# Altium PCB 0084 - AR Display Board Rev2.1.PcbDoc (part 2 of 3)
Units mm, origin at the board's own origin, x right, y up, seen from the top; angles counter-clockwise.
Board outline 127.7 x 27.2 mm, 4 copper layers (L1-TOP, L2-GND, L3-GND, L4-BOT), stack 1.571 mm thick; 141 components, 141 nets, 671 pads, 447 vias.
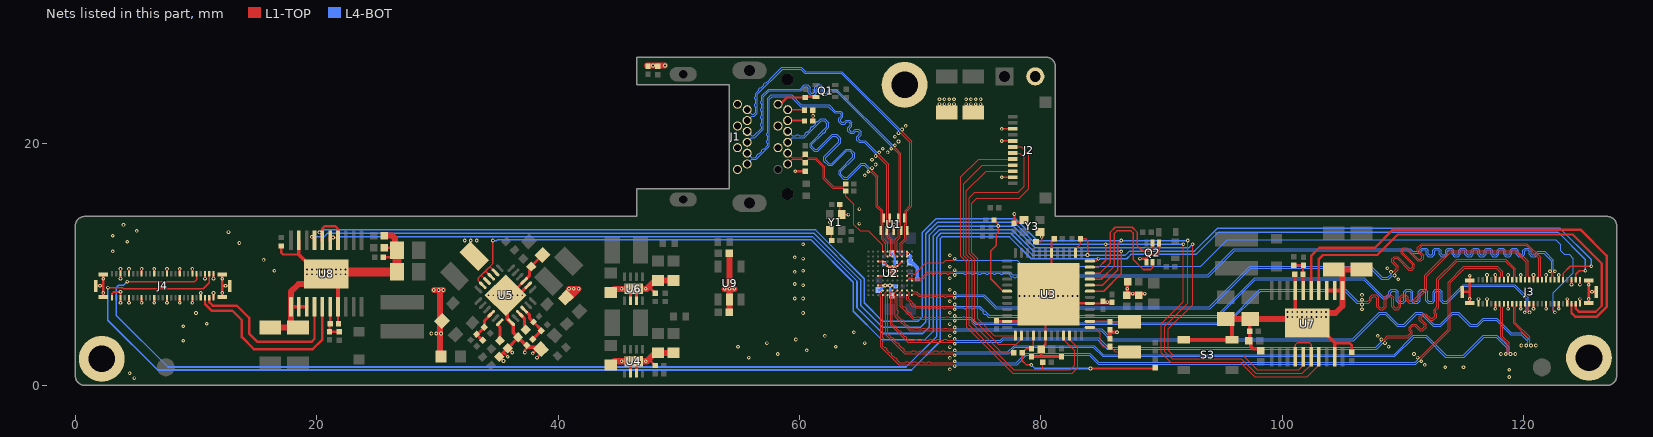
[diagram p4: the nets of this part, all layers, seen from the top]

## Via types
v1: diameter 0.3, hole 0.15, L1-TOP to L4-BOT, tented both sides, 445 vias
v2: diameter 0.25, hole 0.1, L1-TOP to L4-BOT, tented both sides, 2 vias

## Nets (pads, with @x,y where several pads share a name; then routed paths per layer and width w, separated by ;. In a path a pad name is that pad's centre, name@x,y a point inside that pad or via, vN(x,y) a via of type N, cw(c..) or ccw(c..) an arc to the next point about the centre after c; other vN are vias at no path point) (continued)
CN: C41.1 U5.18 | length 2
  L1-TOP w0.1: U5.18@34.944,4.999 U5.18@35.167,5.221
  L1-TOP w0.25: U5.18@35.167,5.221 35,5.055 35,5 35.182,4.818 C41.1@35.182,3.718
CP: C40.1 U5.21 | length 1.6
  L1-TOP w0.25: U5.21@36.829,5.929 37.2,5.557 37.2,4.547 C40.1@37.262,4.485
DP_AUX_CH_N: C3.2 J1.18 R2.2 U2.A4 | length 13.5
  L1-TOP w0.076: J1.18@59.015,18.34 59.389,18.714 60.186,18.714 R2.2@60.46,18.44 60.734,18.714 61.286,18.714 61.948,18.052 61.948,17.137 62.761,16.324 63.606,16.324 C3.2@63.83,16.1 63.83,15.67 64.5,15 64.5,13.326 65.026,12.8 65.7,12.8 66.9,11.6 U2.A4@66.9,11.075
DP_AUX_CH_P: C2.2 J1.16 R1.1 | length 6.8
  L1-TOP w0.076: J1.16@59.015,19.24 59.389,18.866 60.186,18.866 R1.1@60.46,19.14 60.734,18.866 61.349,18.866 62.1,18.116 62.1,17.2 62.824,16.476 63.606,16.476 C2.2@63.83,16.7
DP_CFG1: J1.4 R4.2 | length 1.4
  L1-TOP w0.15: J1.4@59.015,22.84 60.37,22.84 R4.2@60.41,22.8
DP_CFG2: J1.6 R3.2 | length 1.4
  L1-TOP w0.15: J1.6@59.015,21.94 60.37,21.94 R3.2@60.41,21.9
DP_HPD: J1.2 Q1.3 R23.2 | length 3.5
  L1-TOP w0.2: J1.2@58.215,23.09 58.975,23.85 R23.2@60.46,23.85 60.51,23.9 Q1.3@61.36,23.9
DP_LANE0_N: J1.10 U1.9 U2.A5 | length 28.7
  L1-TOP w0.076: v1(66,18) 66,17.808 66.5,17.308 66.5,14.876 66.905,14.471 66.905,13.395 66.945,13.355 66.945,12.171 67.3,11.816 U2.A5@67.3,11.075
  L4-BOT w0.076: J1.10@59.015,21.04 59.389,20.666 59.675,20.666 cw(c59.827,20.551) 59.98,20.666 60.2,20.666 60.341,20.666 60.45,20.775 cw(c60.639,20.802) 60.666,20.991 60.881,21.206 cw(c61.07,21.233) 61.097,21.422 61.312,21.637 cw(c61.501,21.664) 61.528,21.853 61.562,21.888 61.75,22.075 62.1,22.075 62.425,21.75 62.425,21.375 62.175,21.125 cw(c61.986,21.098) 61.959,20.909 61.875,20.825 61.025,19.975 61.025,19.8 61.275,19.55 61.459,19.55 62.709,20.8 63.066,20.8 63.402,20.463 63.402,20.102 62.175,18.875 62.175,18.65 62.448,18.377 62.662,18.377 63.862,19.577 64.213,19.577 64.577,19.213 64.577,18.877 63.425,17.725 63.425,17.5 63.7,17.225 63.934,17.225 65.112,18.402 65.405,18.402 65.808,18 v1(66,18)
DP_LANE0_P: J1.12 U1.1 U2.B5 | length 28.7
  L1-TOP w0.076: v1(65.7,17.7) 65.892,17.7 66.348,17.245 66.348,14.812 66.753,14.407 66.753,13.332 66.793,13.292 66.793,12.107 67.148,11.752 67.148,11.223 67.1,11.175 67.1,10.875 U2.B5@67.3,10.675
  L4-BOT w0.076: J1.12@59.015,20.14 59.389,20.514 60.404,20.514 61.813,21.923 62.037,21.923 62.273,21.687 62.273,21.438 60.873,20.038 60.873,19.737 61.212,19.398 61.523,19.398 62.773,20.648 63.002,20.648 63.25,20.4 63.25,20.166 62.023,18.938 62.023,18.587 62.384,18.225 62.725,18.225 63.925,19.425 64.15,19.425 64.425,19.15 64.425,18.941 63.273,17.788 63.273,17.437 63.637,17.073 63.998,17.073 65.175,18.25 65.342,18.25 65.7,17.892 v1(65.7,17.7)
DP_LANE1_N: J1.15 U1.8 U2.A6 | length 28.7
  L1-TOP w0.076: v1(66.6,19.3) 66.6,19.108 67.397,18.31 67.397,13.388 67.435,13.351 67.435,12.34 67.7,12.075 U2.A6@67.7,11.075
  L4-BOT w0.076: J1.15@55.665,19.24 56.039,18.866 56.351,18.866 56.458,18.974 56.458,19.082 56.566,19.189 56.674,19.189 56.889,19.405 56.889,19.513 56.997,19.621 57.105,19.621 57.321,19.836 57.36,19.876 57.36,20.028 57.284,20.104 57.284,20.257 57.36,20.333 57.36,20.638 57.284,20.714 57.284,20.866 57.36,20.942 57.36,21 57.36,23.776 57.659,24.075 59.341,24.075 60.163,23.252 62.455,23.252 62.98,22.728 63.394,22.728 63.59,22.532 63.59,22.243 63.402,22.055 63.402,21.892 63.508,21.785 63.671,21.785 63.859,21.974 64.149,21.974 64.344,21.778 64.344,21.489 64.156,21.3 64.156,21.137 64.262,21.031 64.425,21.031 64.614,21.219 64.903,21.219 65.099,21.024 65.099,20.734 64.91,20.546 64.91,20.383 65.017,20.277 65.431,20.277 65.707,20 66.408,19.3 v1(66.6,19.3)
DP_LANE1_P: J1.17 U1.2 U2.B6 | length 28.7
  L1-TOP w0.076: v1(66.3,19) 66.492,19 67.245,18.247 67.245,13.325 67.282,13.288 67.282,12.277 67.548,12.012 67.548,11.223 67.5,11.175 67.5,10.875 U2.B6@67.7,10.675
  L4-BOT w0.076: J1.17@55.665,18.34 56.039,18.714 56.414,18.714 57.512,19.812 57.512,23.712 57.723,23.923 59.277,23.923 60.1,23.1 62.392,23.1 62.917,22.575 63.331,22.575 63.438,22.469 63.438,22.306 63.249,22.118 63.249,21.828 63.445,21.633 63.734,21.633 63.922,21.821 64.086,21.821 64.192,21.715 64.192,21.552 64.004,21.363 64.004,21.074 64.199,20.879 64.489,20.879 64.677,21.067 64.84,21.067 64.946,20.961 64.946,20.797 64.758,20.609 64.758,20.32 64.953,20.124 65.368,20.124 65.555,19.937 66.3,19.192 v1(66.3,19)
DP_LANE2_N: J1.9 U1.4 U2.A7 | length 28.7
  L1-TOP w0.076: v1(67.9,19.9) 67.9,19.708 68.397,19.21 68.397,13.347 68.347,13.297 68.347,12.272 68.1,12.025 U2.A7@68.1,11.075
  L4-BOT w0.076: J1.9@55.665,21.04 56.039,20.666 56.226,20.666 56.86,21.301 56.86,21.453 56.784,21.529 56.784,21.682 56.86,21.758 56.86,22.063 56.784,22.139 56.784,22.291 56.86,22.367 56.86,22.672 56.784,22.748 56.784,22.901 56.86,22.977 56.86,23.282 56.784,23.358 56.784,23.51 56.86,23.587 56.86,23.775 56.86,23.976 57.434,24.55 59.85,24.55 60.053,24.55 60.395,24.893 60.672,24.893 60.876,24.688 60.876,24.323 60.992,24.207 61.142,24.207 61.257,24.323 61.257,24.688 61.462,24.893 61.738,24.893 61.943,24.688 61.943,24.323 62.058,24.207 62.209,24.207 62.551,24.55 63.058,24.55 67.708,19.9 v1(67.9,19.9)
DP_LANE2_P: J1.11 U1.7 U2.B7 | length 28.7
  L1-TOP w0.076: v1(67.6,19.6) 67.792,19.6 68.245,19.147 68.245,13.411 68.195,13.361 68.195,12.336 67.948,12.088 67.948,11.223 67.9,11.175 67.9,10.875 U2.B7@68.1,10.675
  L4-BOT w0.076: J1.11@55.665,20.14 56.039,20.514 56.289,20.514 57.012,21.237 57.012,23.912 57.498,24.398 59.918,24.398 60.116,24.398 60.458,24.74 60.609,24.74 60.724,24.625 60.724,24.26 60.929,24.055 61.205,24.055 61.41,24.26 61.41,24.625 61.525,24.74 61.675,24.74 61.791,24.625 61.791,24.26 61.995,24.055 62.272,24.055 62.614,24.398 62.995,24.398 67.6,19.792 v1(67.6,19.6)
DP_LANE3_N: J1.3 U1.5 U2.A8 | length 28.7
  L1-TOP w0.076: U2.A8@68.5,11.075 68.5,11.725 68.855,12.08 68.855,13.289 68.895,13.329 68.895,14.42 69.3,14.824 69.3,20.208 68.5,21.008 v1(68.5,21.2)
  L4-BOT w0.076: J1.3@55.665,22.84 56.039,22.466 56.2,22.466 56.36,22.626 56.36,22.9 56.36,23.052 56.284,23.129 56.284,23.281 56.36,23.357 56.36,23.662 56.284,23.738 56.284,23.891 56.36,23.967 56.36,24.1 56.36,24.176 56.5,24.316 56.615,24.43 56.615,24.538 56.722,24.646 56.83,24.646 57.046,24.861 57.046,24.969 57.153,25.077 57.261,25.077 57.477,25.292 57.584,25.4 58.537,26.352 60.148,26.352 60.5,26 63.508,26 68.308,21.2 v1(68.5,21.2)
DP_LANE3_P: J1.5 U1.6 U2.B8 | length 28.7
  L1-TOP w0.076: v1(68.2,20.9) 68.392,20.9 69.148,20.145 69.148,14.888 68.743,14.483 68.743,13.393 68.703,13.353 68.703,12.143 68.348,11.788 68.348,11.223 68.3,11.175 68.3,10.875 U2.B8@68.5,10.675
  L4-BOT w0.076: J1.5@55.665,21.94 56.039,22.314 56.263,22.314 56.512,22.563 56.512,24.112 58.6,26.2 60.084,26.2 60.437,25.848 63.445,25.848 68.2,21.092 v1(68.2,20.9)
FBL: C49.2 R35.2 R37.2 U7.16 | length 2.9
  L1-TOP w0.2: R35.2@100.96,9.95 C49.2@101.74,9.95 ; U7.16@101.75,7.844 U7.16@101.729,7.865 101.729,9.181 R37.2@101.71,9.2 101.71,9.92 C49.2@101.74,9.95 ; C49.2@101.76,9.97 C49.2@101.74,9.95
FBN: C36.2 R29.2 R30.2 U5.16 | length 3
  L1-TOP w0.25: R30.2@33.747,3.747 33.719,3.747 C36.2@33.233,4.233 33.316,4.233 R29.2@33.897,4.814 33.897,5.365 U5.16@34.46,5.929
FBP: C34.2 R26.2 R28.2 U5.22 | length 3.3
  L1-TOP w0.1: R26.2@38.597,4.519 R26.2@38.597,4.613
  L1-TOP w0.25: U5.22@37.182,6.282 37.644,5.82 37.644,5.566 C34.2@37.956,5.253 R26.2@38.597,4.613 ; R28.2@37.892,3.814 R26.2@38.597,4.519
FBR: C50.2 R36.2 R38.2 U8.16 | length 3
  L1-TOP w0.2: C50.2@20.96,4.43 20.96,4.45 C50.2@21.06,4.45 ; R38.2@21.01,5.1 21.118,5.208 U8.16@21.118,6.516 ; R38.2@21.06,5.1 C50.2@21.06,4.45 ; R36.2@21.86,4.45 C50.2@21.06,4.45
GND: C1.1 C4.1 C5.2 C6.2 C7.2 C8.2 C9.2 C10.1 C11.1 C12.1 C13.1 C14.1 C15.1 C16.1 C17.1 C18.1 C19.1 C20.1 C21.1 C22.1 C23.1 C24.1 C25.1 C26.2 C27.2 C28.1 C29.1 C30.1 C31.1 C32.1 C33.1 C35.2 C37.1 C38.1 C39.1 C40.2 C41.2 C42.1 C43.1 C44.1 C45.1 C46.1 C47.1 C48.1 C51.1 C52.1 C53.1 C54.1 C55.2 C56.2 C57.1 C58.2 C59.2 C60.1 C61.1 C62.1 CON2.2 J1.1 J1.7 J1.8 J1.13 J1.14 J1.19 J2.2 J2.8 J2.10 J3.1 J3.5 J3.6 J3.9 J3.10 J3.15 J3.16 J3.21 J3.22 J3.27 J3.28 J3.33 J3.34 J3.39 J3.40 J3.43 J3.46 J3.49 J3.50 J3.M J4.1 J4.5 J4.6 J4.9 J4.10 J4.15 J4.16 J4.21 J4.22 J4.27 J4.28 J4.33 J4.34 J4.39 J4.40 J4.43 J4.46 J4.49 J4.50 J4.M L4.2 pad.0 Q2.1 Q2.4 R2.1 R3.1 R4.1 R5.1 R27.1 R28.1 R34.1 R37.1 R38.1 R39.1 R40.1 R41.1 R42.1 S3.1 U1.3 U2.A9 U2.B9 U2.C3 U2.C4 U2.C8 U2.D5 U2.D6 U2.D7 U2.E5 U2.E6 U2.E7 U2.F3 U2.F4 U2.F5 U2.F6 U2.F7 U2.H3 U2.H4 U2.H5 U2.H6 U3.5 U3.18 U3.35 U3.42 U3.49 U4.2 U4.3 U4.9 U5.2 U5.3 U5.19 U5.25 U6.2 U6.3 U6.9 U7.9 U7.11 U7.12 U7.13 U7.17 U7.21 U8.9 U8.11 U8.12 U8.13 U8.17 U8.21 U9.2 Y1.2 Y1.4 Y3.2 Y3.4 | length 216.9
  L1-TOP w0.1: U5.25@35.775,7.467 U5.25@35.998,7.467 ; C40.2@36.626,3.848 36.815,3.848 C40.2@36.867,3.848 ; C33.1@38.71,10.796 C33.1@38.71,10.801 ; U4.9@46.01,1.75 v1(46.26,2) U4.9@46.51,1.75 ; U6.9@46.01,7.75 v1(46.26,8) U6.9@46.51,7.75 ; C43.1@48.01,8.35 C43.1@48.36,8.7 ; C32.1@48.11,2.35 48.46,2.7 C32.1@48.31,2.85 ; U3.49@78.375,5.3 80.375,7.3 U3.49@80.625,7.55 ; U3.49@80.875,7.8 U3.49@80.625,7.55 ; U3.49@81.375,6.8 U3.49@80.625,7.55 ; U7.21@101.23,5.979 101.709,5.5 U7.21@102.05,5.159 102.641,5.159 U7.21@102.741,5.159 ; U7.21@101.9,6 U7.21@103.25,4.65 ; U7.21@102.379,5.488 U7.21@102.841,5.95
  L1-TOP w0.125: v1(76.75,17.25) J2.2@77.66,17.25 77.635,17.25 J2.2@77.66,17.275 ; v1(76.75,20.25) J2.8@77.66,20.25 ; v1(76.75,21.25) J2.10@77.66,21.25
  L1-TOP w0.127: R3.1@61.11,21.9 R4.1@61.11,22.8 R4.1@61.135,22.775 ; Y1.2@62.46,12.85 62.63,12.68 C7.2@62.63,12 ; Y1.2@62.5,12.85 v1(62.5,13.5) ; Y1.4@63.29,14.32 Y1.4@63.46,14.15 ; C8.2@63.33,15 63.33,14.32 Y1.4@63.5,14.15 v1(64.05,14.15)
  L1-TOP w0.15: v1(77.8,14.2) 77.8,13.47 C59.2@77.76,13.43 77.83,13.5 78.41,13.5 Y3.4@78.61,13.7 ; C58.2@79.59,11.9 79.96,11.9 80.06,12 80.06,12.55 Y3.2@79.91,12.7
  L1-TOP w0.152: J4.1@3.05,7.25 3.05,7.6 3.2,7.75 v1(3.75,7.75) ; U2.H3@66.5,8.275 U2.H4@66.9,8.275 U2.H5@67.3,8.275 U2.H6@67.7,8.275 ; U2.F3@66.5,9.075 66.502,9.073 67.298,9.073 U2.F5@67.3,9.075 U2.F6@67.7,9.075 ; U2.C3@66.5,10.275 66.502,10.273 66.902,10.273 U2.D5@67.3,9.875 67.302,9.873 U2.D6@67.7,9.873 ; U2.E5@67.3,9.475 U2.E6@67.7,9.475 ; U2.F7@68.1,9.075 U2.F6@67.7,9.075 ; U2.E7@68.1,9.475 U2.E6@67.7,9.475 ; U2.C8@68.5,10.275 U2.D7@68.1,9.875 68.098,9.873 U2.D6@67.7,9.873 ; C13.1@76.3,5.355 C13.1@76.355,5.3 ; U2.F6@67.7,9.075 U2.E6@67.7,9.475 ; U2.E6@67.7,9.475 U2.D6@67.7,9.873 ; U2.B9@68.9,10.675 69,10.775 v1(69,10.875) 69,10.975 U2.A9@68.9,11.075 U2.B9@68.9,10.675
  L1-TOP w0.175: U3.5@84.05,6.8 C17.1@85.8,6.8
  L1-TOP w0.18: v1(3.75,6.85) J4.5@3.75,7.25 v1(3.75,7.75) ; v1(3.75,8.85) J4.6@3.75,9.25 v1(3.75,9.65) ; v1(4.45,6.85) J4.9@4.45,7.25 ; J4.10@4.45,9.25 v1(4.45,9.65) ; v1(5.5,6.85) J4.15@5.5,7.25 ; J4.16@5.5,9.25 v1(5.5,9.65) ; v1(6.55,6.85) J4.21@6.55,7.25 ; J4.22@6.55,9.25 v1(6.55,9.65) ; v1(7.6,6.85) J4.27@7.6,7.25 ; J4.28@7.6,9.25 v1(7.6,9.65) ; v1(8.65,6.85) J4.33@8.65,7.25 ; J4.34@8.65,9.25 v1(8.65,9.65) ; v1(9.7,6.85) J4.39@9.7,7.25 ; J4.40@9.7,9.25 v1(9.7,9.65) ; J4.43@10.4,7.25 v1(10.4,7.65) ; v1(10.75,8.85) J4.46@10.75,9.25 ; J4.49@11.45,7.25 v1(11.45,7.65) ; v1(11.45,8.85) J4.50@11.45,9.25 ; J3.M@115.385,6.815 J3.M@115.525,6.815 ; J3.M@115.385,8.685 J3.M@115.525,8.685 v1(115.525,9.085) ; J3.1@116.25,6.75 v1(116.25,7.15) ; J3.5@116.95,6.75 v1(116.95,7.15) ; J3.6@116.95,8.75 v1(116.95,9.15) ; v1(117.65,6.35) J3.9@117.65,6.75 ; J3.10@117.65,8.75 v1(117.65,9.15) ; v1(118.7,6.35) J3.15@118.7,6.75 ; J3.16@118.7,8.75 v1(118.7,9.15) ; v1(119.75,6.35) J3.21@119.75,6.75 ; J3.22@119.75,8.75 v1(119.75,9.15) ; v1(120.8,6.35) J3.27@120.8,6.75 ; J3.28@120.8,8.75 v1(120.8,9.15) ; v1(121.85,6.35) J3.33@121.85,6.75 ; J3.34@121.85,8.75 v1(121.85,9.15) ; v1(122.9,6.35) J3.39@122.9,6.75 ; J3.40@122.9,8.75 v1(122.9,9.15) ; J3.43@123.6,6.75 v1(123.6,7.15) ; v1(123.95,8.35) J3.46@123.95,8.75 ; J3.49@124.65,6.75 v1(124.65,7.15) ; v1(124.65,8.35) J3.50@124.65,8.75
  L1-TOP w0.2: J4.M@1.7,8.25 2.325,8.25 ; J4.M@2.325,7.315 v1(2.325,7.665) 2.325,8.25 ; J4.M@2.325,9.185 v1(2.325,8.835) 2.325,8.25 ; J4.M@12.175,7.315 12.175,8.25 ; J4.M@12.175,9.185 v1(12.175,8.835) 12.175,8.25 ; J4.M@12.8,8.25 12.175,8.25 ; R42.1@17.06,11.55 17.06,11 17.218,10.842 18.518,10.842 ; R38.1@21.71,5.1 21.768,5.158 U8.17@21.768,6.516 ; R41.1@25.51,10.6 C47.1@26.66,10.6 ; C56.2@25.61,11.4 26.66,11.4 C47.1@26.66,11.2 ; C35.2@35.118,2.382 v1(35.475,2.025) ; 35.456,2.719 35.481,2.719 v1(35.825,2.375) ; C41.2@35.818,3.082 36.175,2.725 v1(36.2,2.725) ; v1(37.25,2.725) 37.25,2.925 R28.1@37.5,3.175 ; v1(37.9,2.65) 38.225,2.975 C30.1@38.225,3.175 ; v1(38.25,2.3) 38.578,2.628 C30.1@38.578,3.001 ; v1@47.36,2 47.71,2 R27.1@48.06,1.65 ; v1@47.36,8 47.71,8 R34.1@48.06,7.65 ; v1(59.64,17.74) R2.1@60.46,17.74 ; U1.3@67.82,12.83 v1(67.82,13.34) ; C13.1@76.355,5.3 U3.49@78.375,5.3 ; C4.1@79.2,2.37 80,2.37 ; C9.2@80.01,3 80.01,2.38 80,2.37 ; C9.2@80.16,2.85 80.16,3.2 80.375,3.415 U3.49@80.375,7.3 ; U3.49@80.875,7.8 80.875,11.93 C12.1@81.095,12.15 ; U3.49@81.375,6.8 U3.5@84.05,6.8 ; C11.1@81.7,2.37 80,2.37 ; v1(88.2,10.5) 88.76,10.5 ; Q2.4@88.76,10.2 88.76,10.5 ; 89.76,11.4 89.76,11 89.56,10.8 88.9,10.8 88.76,10.66 88.76,10.5 ; R37.1@101.01,9.2 101.079,9.131 U7.17@101.079,7.865 ; U7.21@102.05,5.159 102.609,4.6 U7.21@103.2,4.6 ; 104.329,3.531 104.36,3.5 105.56,3.5 105.76,3.3 R40.1@105.76,2.75 ; J3.M@114.9,7.75 115.525,7.75 ; J3.M@115.525,6.815 v1(115.525,7.165) 115.525,7.75 ; J3.M@115.525,8.685 115.525,7.75 ; J3.M@125.375,6.815 v1(125.375,7.165) 125.375,7.75 ; J3.M@125.375,8.685 v1(125.375,8.335) 125.375,7.75 ; J3.M@126,7.75 125.375,7.75
  L1-TOP w0.25: C35.2@35.118,2.382 35.456,2.719 C41.2@35.818,3.082 36.682,3.945 C40.2@36.682,3.982 C40.2@36.815,3.848 ; U5.19@36.121,5.221 U5.19@36.325,5.018 ; R28.1@37.345,3.319 R28.1@37.397,3.319 ; U5.2@37.536,8.297 36.705,7.467 35.998,7.467 U5.3@37.182,8.651 37.644,9.113 37.644,9.73 C37.1@37.762,9.848 C33.1@38.71,10.796 ; U4.2@46.01,1.005 U4.9@46.01,1.75 ; U6.2@46.01,7.005 U6.9@46.01,7.75 ; U4.3@46.51,1.005 U4.9@46.51,1.75 ; U6.3@46.51,7.005 U6.9@46.51,7.75
  L1-TOP w0.3: U8.11@17.868,6.516 U8.12@18.518,6.516 U8.13@19.168,6.516 ; U8.9@18.518,12.016 18.518,10.842 19.625,9.735 U8.21@19.625,9.7 ; U8.21@19.925,8.35 U8.21@20.25,8.675 ; U8.21@20.468,8.893 U8.21@20.797,9.222 ; U8.21@21.322,8.697 U8.21@20.797,9.222 ; U8.21@21.372,8.647 U8.21@21.672,8.347 ; U8.17@21.768,6.516 U8.21@21.768,8.251 ; C38.1@30.326,5.332 C38.1@30.332,5.332 ; U5.25@35.775,7.467 35.775,5.525 36.3,5 36.3,4.364 C40.2@36.682,3.982 ; C40.2@36.815,3.848 R28.1@37.345,3.319 ; R28.1@37.397,3.319 R28.1@37.541,3.175 ; R28.1@37.5,3.175 C30.1@38.225,3.175 ; C15.1@85.135,6.87 C17.1@85.9,6.87 ; C26.2@85.725,3.88 C27.2@85.725,4.62 ; C27.2@85.8,4.4 v1(86.3,4.4) ; C16.1@87.1,7.45 C16.1@87.15,7.5 ; C10.1@87.21,8.6 87.15,8.6 C16.1@87.15,7.5 ; C14.1@88.1,7.4 C14.1@88.3,7.6 ; v1(88.6,7.6) C14.1@88.3,7.6 ; 89.76,11.4 Q2.1@89.76,11.8 ; S3.1@91.825,3.775 S3.1@95.825,3.775 95.825,4.975 C45.1@95.3,5.5 C45.1@94.925,5.125 ; C46.1@97.35,5.5 97.31,5.46 R39.1@97.31,4.5 97.31,3.8 C55.2@97.21,3.7 97.375,3.535 97.375,3.225 97.575,3.025 98.025,3.025 C57.1@98.2,2.85 ; U7.21@101.079,6.13 U7.17@101.079,7.865 ; U7.21@102.05,5.159 U7.21@102.379,5.488 ; U7.21@102.49,4.84 U7.21@102.96,4.84 ; U7.21@102.641,5.159 U7.21@102.96,4.84 ; U7.21@103.2,4.6 U7.21@102.96,4.84 ; U7.13@103.679,7.865 U7.12@104.329,7.865 U7.11@104.979,7.865 ; U7.9@104.329,2.365 104.329,3.531 103.02,4.84 U7.21@102.96,4.84 ; U8.21@19.625,9.7 20.103,9.222 U8.21@20.797,9.222 ; U8.21@19.625,9.7 20.319,9.7 U8.21@20.797,9.222 ; C16.1@87.15,7.5 87.25,7.6 v1(87.6,7.6) C14.1@88.3,7.6
  L1-TOP w0.5: C54.1@16.16,4.8 C53.1@17.868,4.8 ; C53.1@18.46,4.8 C53.1@17.868,4.8 ; U8.21@19.975,8.85 19.525,8.4 18.5,8.4 17.868,7.768 U8.11@17.868,6.516 C53.1@17.868,4.8 ; U8.21@20.797,9.222 U8.21@20.975,9.4 ; C60.1@25.61,12.4 26.25,12.4 26.5,12.15 26.5,11.56 C47.1@26.66,11.4 ; v1(29.7,7.9) v1(30.1,7.9) v1@30.451,7.9 ; v1@30.2,7.9 30.2,5.511 C38.1@30.378,5.332 30.2,5.154 30.2,2.5 C39.1@30.3,2.4 ; L4.2@33.068,10.69 L4.2@33.26,10.882 ; C29.1@40.9,7.531 C29.1@40.9,7.7 ; C28.1@44.36,1.7 44.66,2 v1(46.26,2) 47.36,2 48.06,2.7 C32.1@48.16,2.7 ; C42.1@44.36,7.7 44.66,8 v1(45.76,8) v1(46.26,8) v1(46.76,8) 47.36,8 48.06,8.7 C43.1@48.26,8.7 48.36,8.7 C44.1@49.56,8.7 ; C1.1@47.36,26.5 v1(48.86,26.5) ; C32.1@48.31,2.85 C32.1@48.16,2.7 ; C31.1@49.56,2.7 48.46,2.7 C32.1@48.26,2.7 C32.1@48.16,2.7 ; v1(53.8,8) v1(54.2,8) ; C5.2@54.175,6.05 54.2,6.075 U9.2@54.2,7.1 v1(54.2,8) ; C6.2@54.175,10.95 54.2,10.925 v1(54.2,8) ; v1(54.6,8) v1(54.2,8) ; C45.1@95.3,5.5 C46.1@97.35,5.5 101.709,5.5 U7.21@101.909,5.5 ; U7.21@101.9,6 104.4,6 104.979,6.579 U7.11@104.979,7.865 104.979,9.581 104.96,9.6 C52.1@104.26,9.6 C51.1@106.56,9.6 ; C29.1@40.634,7.266 40.966,7.266 v1(41.7,8) v1(41.3,8) v1@41.2,8 ; C29.1@40.634,7.266 40.634,7.434 C29.1@40.8,7.6 ; C29.1@40.634,7.266 40.8,7.431 C29.1@40.8,7.6 ; C29.1@40.8,7.6 C29.1@40.9,7.7 ; C29.1@40.9,7.7 v1(40.9,8) v1@41.2,8 ; C29.1@40.9,7.7 v1@41.2,8
  L1-TOP w0.75: U8.21@20.975,9.4 C48.1@26.66,9.4 26.66,10.6 C47.1@26.66,11.2
  L4-BOT w0.2: C18.1@66.56,7.9 66.66,7.9 67.035,8.275 v1(67.1,8.275) v1(67.5,8.275) ; C19.1@67.01,10.12 67.09,10.12 67.475,9.735 v1(67.475,9.68) ; C24.1@67.66,7.45 67.5,7.61 v1(67.5,8.275) ; C22.1@67.66,10.95 67.66,10.84 67.898,10.602 v1(67.898,9.68) ; C25.1@67.98,8.2 67.905,8.275 v1(67.5,8.275)
  L4-BOT w0.3: v1(69,10.875) 69.16,10.715 C20.1@69.16,10.2 69.31,10.2 69.74,9.77 C21.1@69.74,8.8
  other v1: 4.9,0.6 118.8,0.7 4.5,1 118.8,1.3 72.46,1.325 113.5,1.5 115,1.5 111.8,1.7 45.26,2 45.76,2 46.76,2 47.26,2 72.46,2.275 55.8,2.3 58.2,2.6 110.9,2.6 118.1,2.6 119.3,2.6 60.6,2.9 72.46,3.175 54.9,3.2 63,3.2 108.8,3.2 119.8,3.3 121,3.3 57.3,3.5 65.4,3.5 8.95,3.7 59.7,3.8 62.1,4.1 107.9,4.1 72.46,4.125 29.5,4.3 29.9,4.3 30.3,4.3 64.5,4.4 8.95,4.9 72.46,5.075 10.9,5.1 100.425,5.675 100.825,5.675 101.225,5.675 101.625,5.675 102.025,5.675 102.425,5.675 102.825,5.675 103.225,5.675 103.625,5.675 10,6 60.3,6 72.46,6.025 100.425,6.075 100.825,6.075 101.225,6.075 101.625,6.075 102.025,6.075 102.425,6.075 102.825,6.075 103.225,6.075 103.625,6.075 106.6,6.3 85.5,6.9 72.46,6.975 59.6,7.2 60.3,7.2 78.225,7.4 78.625,7.4 79.025,7.4 79.425,7.4 79.825,7.4 80.225,7.4 80.625,7.4 81.025,7.4 81.425,7.4 81.825,7.4 82.225,7.4 82.625,7.4 83.025,7.4 34.225,7.475 34.625,7.475 35.025,7.475 35.425,7.475 35.825,7.475 36.225,7.475 36.625,7.475 37.025,7.475 106.6,7.5 12.175,7.665 125.65,7.75 30.5,7.9 72.46,7.925 45.26,8 47.26,8 87.15,8 2.05,8.25 12.45,8.25 60.3,8.3 59.6,8.4 109.6,8.8 72.46,8.875 19.2,9.2 19.6,9.2 20,9.2 20.4,9.2 20.8,9.2 21.2,9.2 21.6,9.2 22,9.2 22.4,9.2 67.475,9.275 67.898,9.275 59.6,9.4 16.5,9.5 60.3,9.5 19.2,9.6 19.6,9.6 20,9.6 20.4,9.6 20.8,9.6 21.2,9.6 21.6,9.6 22,9.6 22.4,9.6 108.7,9.7 72.46,9.825 15.6,10.4 60.3,10.5 59.6,10.6 72.46,10.775 3.1,11.1 60.3,11.7 13.6,11.8 4.3,11.9 32.26,12 32.76,12 33.26,12 80.06,12.3 3.1,12.4 12.7,12.7 5.1,12.8 4,13.3 64.96,13.4 64.96,14.6 65.4,17.4 66.3,18.3 66,18.7 67.3,19.3 66.9,19.6 68.2,20.2 67.9,20.6 68.8,21.5 61.125,22.325 71.6,23.3 72,23.3 72.4,23.3 72.8,23.3 73.8,23.3 74.2,23.3 74.6,23.3 75,23.3 71.6,23.7 72,23.7 72.4,23.7 72.8,23.7 73.8,23.7 74.2,23.7 74.6,23.7 75,23.7 47.86,26.5
LCD_BIAS_EN: U3.7 U5.8 U5.9 U5.10 U5.11 | length 77.5
  L1-TOP w0.127: U5.11@33.753,8.297 33.4,8.65 33.4,8.9 33.6,9.1 ; U5.10@34.106,8.651 33.657,9.1 33.6,9.1 ; 34.371,9.8 U5.8@34.813,9.358 ; U5.9@34.46,9.004 34,9.464 34,9.5 ; v1(34.6,12) 34.6,10.1 34,9.5 ; U3.7@84.05,7.8 85.2,7.8 86.66,9.26 v1(86.66,11.1) ; 33.6,9.1 34,9.5
  L4-BOT w0.127: v1(34.6,12) 34.9,12 34.975,12.075 60.925,12.075 64.46,8.54 64.46,6.14 66.8,3.8 70.4,3.8 71.06,4.46 71.06,12.36 71.6,12.9 77.6,12.9 79.4,11.1 v1(86.66,11.1)
LCD_BL_EN: U3.8 U7.4 U7.6 U8.4 U8.6 | length 121.7
  L1-TOP w0.1: v1(92.16,12) 92.16,6.8 90.26,4.9 90.26,2.8 90.86,2.2 96.6,2.2 97.8,1 101.66,1 102.379,1.719 U7.6@102.379,2.365
  L1-TOP w0.127: U3.8@84.05,8.3 85.1,8.3 86.37,9.57 86.37,11.71 v1(86.66,12) ; U7.4@101.079,2.365 101.079,3.379 101.25,3.55 102.25,3.55 102.379,3.421 U7.6@102.379,2.365
  L1-TOP w0.2: U8.6@20.468,12.016 20.468,12.989 20.661,13.182 21.561,13.182 21.768,12.975 U8.4@21.768,12.016
  L1-TOP w0.3: v1(20.235,12.675) 20.468,12.675 U8.6@20.468,12.016
  L4-BOT w0.127: v1(20.235,12.675) 20.435,12.875 61.325,12.875 65.36,8.84 65.36,6.84 66.9,5.3 69.8,5.3 70.16,5.66 70.16,12.66 71.3,13.8 77.9,13.8 79.7,12 v1(92.16,12)
LCD_BL_FAULT: R10.1 U3.30 U7.5 U8.5 | length 114.7
  L1-TOP w0.1: v1(92.56,11.7) 92.56,6.7 90.56,4.7 90.56,2.9 90.96,2.5 96.7,2.5 97.9,1.3 101.36,1.3 101.729,1.669 U7.5@101.729,2.365
  L1-TOP w0.127: R10.1@76.11,13.7 76.46,13.35 76.46,12.7 76.31,12.55 76.31,11.61 75.835,11.135 75.835,8.825 76.86,7.8 U3.30@77.2,7.8
  L1-TOP w0.3: U8.5@21.118,12.016 21.118,12.25 v1(21.36,12.25)
  L4-BOT w0.127: v1(21.36,12.25) 21.65,12.25 21.725,12.325 61.075,12.325 64.76,8.64 64.76,6.44 66.9,4.3 70.2,4.3 70.76,4.86 70.76,12.46 71.5,13.2 v1(76.46,13.2) 77.7,13.2 79.5,11.4 92.26,11.4 v1(92.56,11.7)
LCD_BL_K1_L: J3.47 U7.14 | length 34.2
  L1-TOP w0.2: U7.14@103.029,7.865 103.029,10.469 103.36,10.8 107.86,10.8 109.56,12.5 124.05,12.5 126.46,10.09 126.46,6.6 125.96,6.1 124.56,6.1 124.3,6.36 J3.47@124.3,6.75
LCD_BL_K1_R: J4.47 U8.14 | length 14
  L1-TOP w0.2: J4.47@11.1,7.25 11.1,6.9 11.4,6.6 13.4,6.6 14.4,5.6 14.4,4.3 15.1,3.6 19.56,3.6 19.818,3.858 U8.14@19.818,6.516
LCD_BL_K2_L: J3.45 U7.15 | length 37.5
  L1-TOP w0.2: U7.15@102.379,7.865 102.379,10.719 103.06,11.4 107.66,11.4 109.16,12.9 124.7,12.9 126.86,10.74 126.86,6.5 126.06,5.7 124.26,5.7 123.95,6.01 J3.45@123.95,6.75
LCD_BL_K2_R: J4.45 U8.15 | length 15.6
  L1-TOP w0.2: J4.45@10.75,7.25 10.75,6.75 11.3,6.2 13,6.2 13.8,5.4 13.8,4 14.8,3 19.66,3 20.468,3.808 U8.15@20.468,6.516
LCD_BL_LEDPWM: J3.48 J4.48 U3.12 | length 151.4
  L1-TOP w0.127: v1(2.7,8.1) 3.9,8.1 4,8 10.6,8 11.1,8.5 J4.48@11.1,9.25 ; U3.12@84.05,10.3 84.56,10.3 v1(84.76,10.5) ; J3.48@124.3,8.75 124.3,9.2 124.6,9.5 v1(125.1,9.5)
  L4-BOT w0.127: v1(2.7,8.1) 2.7,5.4 6.825,1.275 69.275,1.275 71.66,3.66 71.66,12.16 71.8,12.3 77.4,12.3 79.2,10.5 v1(84.76,10.5) 87.1,10.5 87.45,10.85 92.85,10.85 94.7,12.7 122.825,12.7 125.1,10.425 v1(125.1,9.5)
LCD_BL_PWM: U3.11 U7.7 U8.7 | length 113.3
  L1-TOP w0.1: v1(91.8,11.7) 91.8,6.94 89.96,5.1 89.96,2.7 90.76,1.9 96.5,1.9 97.7,0.7 102.06,0.7 103.029,1.669 U7.7@103.029,2.365
  L1-TOP w0.127: U3.11@84.05,9.8 84.8,9.8 85.36,10.36 v1(85.36,11.7)
  L1-TOP w0.3: v1(19.585,12.3) U8.7@19.8,12.3
  L4-BOT w0.127: v1(19.585,12.3) 20.6,12.3 20.9,12.6 61.2,12.6 65.06,8.74 65.06,6.64 66.9,4.8 70,4.8 70.46,5.26 70.46,12.56 71.4,13.5 77.8,13.5 79.6,11.7 v1(85.36,11.7) 85.37,11.69 v1@91.8,11.69
LCD_RESET_N: J3.42 J4.42 R12.1 U3.14 | length 152.7
  L1-TOP w0.127: v1(4.3,8.6) 9.9,8.6 10.05,8.75 J4.42@10.05,9.25 ; U3.14@82.875,10.975 82.875,11.315 83.275,11.715 R12.1@83.275,12.15 83.71,12.15 83.86,12 v1(83.86,10.8) ; J3.42@123.25,8.75 123.25,9.275 123.85,9.875 v1(125.6,9.875)
  L4-BOT w0.127: v1(4.3,8.6) 4,8.3 3.6,8.3 3.4,8.1 3.4,5.8 7.675,1.525 68.825,1.525 71.36,4.06 71.36,12.26 71.7,12.6 77.5,12.6 79.3,10.8 v1(83.86,10.8) 87,10.8 87.325,11.125 92.725,11.125 94.6,13 123,13 125.6,10.4 v1(125.6,9.875)
MCU_EXT2: J2.7 U3.37 | length 23.1
  L1-TOP w0.1: J2.7@77.66,19.75 78.35,19.75 79,19.1 79,16.3 78.2,15.5 74.7,15.5 74.275,15.075 74.275,10.985 74.75,10.51 74.75,5.51 76.135,4.125 U3.37@77.875,4.125
MCU_EXT3: J2.6 U3.38 | length 24
  L1-TOP w0.1: J2.6@77.66,19.25 78.25,19.25 78.6,18.9 78.6,16.5 78.1,16 74.5,16 74.05,15.55 74.05,10.91 74.525,10.435 74.525,5.335 76.46,3.4 77.96,3.4 78.375,3.815 U3.38@78.375,4.125
MCU_LED0: Q2.2 U3.10 | length 10.2
  L1-TOP w0.127: U3.10@84.05,9.3 84.9,9.3 85.76,10.16 85.76,12.7 86.16,13.1 87.56,13.1 87.96,12.7 87.96,11.6 88.36,11.2 89.1,11.2 89.26,11.36 Q2.2@89.26,11.8
MCU_LED1: Q2.5 U3.9 | length 11.6
  L1-TOP w0.127: U3.9@84.05,8.8 85,8.8 86.06,9.86 86.06,12.56 86.3,12.8 87.46,12.8 87.66,12.6 87.66,10.4 88.46,9.6 89.1,9.6 89.26,9.76 Q2.5@89.26,10.2
MCU_RESET_N: C4.2 R13.2 R15.2 U3.40 | length 14.1
  L1-TOP w0.127: v1(79.2,1.7) 78.8,1.7 78.45,2.05 R13.2@78.45,2.7 78.78,3.03 C4.2@79.2,3.03 ; C4.2@79.26,3.03 C4.2@79.2,3.03 ; U3.40@79.375,4.125 79.375,3.215 79.19,3.03 C4.2@79.2,3.03 ; v1(84.1,1.4) 89.36,1.4 R15.2@89.46,1.5
  L4-BOT w0.127: v1(79.2,1.7) 79.5,1.4 v1(84.1,1.4)
MCU_SWD_CLK: J2.4 R9.1 U3.45 | length 30.5
  L1-TOP w0.1: J2.4@77.66,18.25 75.15,18.25 73.6,16.7 73.6,10.76 74.075,10.285 74.075,4.985 77.76,1.3 80.15,1.3 ; R9.1@80.15,1.9 80.15,1.3 ; U3.45@81.875,4.125 81.875,3.785 82.8,2.86 82.8,1.675 82.425,1.3 80.15,1.3
MCU_SWD_IO: J2.5 U3.46 | length 31.5
  L1-TOP w0.1: J2.5@77.66,18.75 74.85,18.75 73.375,17.275 73.375,10.685 73.85,10.21 73.85,4.81 77.66,1 82.6,1 83.05,1.45 83.05,3.11 82.375,3.785 U3.46@82.375,4.125
MCU_SWD_RESET_N: J2.3 R13.1 | length 20.1
  L1-TOP w0.1: J2.3@77.66,17.75 75.45,17.75 73.825,16.125 73.825,10.835 74.3,10.36 74.3,5.16 76.76,2.7 R13.1@77.75,2.7
MCU_XIN32: C26.1 U3.1 Y2.1 | length 4.6
  L1-TOP w0.1: U3.1@84.05,4.8 84.4,4.8 84.9,4.3 84.9,3.5 85.18,3.22 C26.1@85.725,3.22 86.17,2.775 Y2.1@87.325,2.775
MCU_XOUT32: C27.1 U3.2 Y2.0 | length 3.6
  L1-TOP w0.1: U3.2@84.05,5.3 U3.2@84.07,5.28 ; C27.1@85.705,5.3 C27.1@85.725,5.28 ; Y2.0@87.145,5.28 Y2.0@87.325,5.1
  L1-TOP w0.127: U3.2@84.05,5.3 C27.1@85.705,5.3 ; C27.1@85.725,5.28 Y2.0@87.145,5.28 ; Y2.0@87.325,5.1 Y2.0@87.325,5.275
MIPI_DSI00_0_N: J3.11 U2.J5 | length 63.9
  L1-TOP w0.076: U2.J5@67.3,7.875 67.1,7.675 67.1,7.392 67.144,7.348 67.144,4.2 68.721,2.624 72.736,2.624 v1(72.86,2.5) ; J3.11@118,6.75 118,6.575 118.099,6.476 118.099,3.986 118.624,3.461 118.624,2.724 v1(118.5,2.6)
  L4-BOT w0.076: v1(72.86,2.5) 72.984,2.624 77.324,2.624 77.848,3.148 84.352,3.148 85.1,2.4 109.316,2.4 110.916,4 111.859,4 113.512,2.348 115.063,2.348 116.716,4 117.7,4 118.624,3.076 118.624,2.724 v1(118.5,2.6)
MIPI_DSI00_0_P: J3.13 U2.K5 | length 63.9
  L1-TOP w0.076: U2.K5@67.3,7.475 67.3,4.26 67.36,4.2 67.383,4.177 67.598,3.962 67.706,3.962 67.814,3.854 67.814,3.746 68.029,3.531 68.137,3.531 68.245,3.423 68.245,3.315 68.461,3.1 68.568,3.1 68.676,2.992 68.676,2.884 68.784,2.776 68.995,2.776 69.3,2.776 69.376,2.852 69.528,2.852 69.604,2.776 69.909,2.776 69.985,2.852 70.138,2.852 70.214,2.776 70.519,2.776 70.595,2.852 70.747,2.852 70.824,2.776 71.128,2.776 71.205,2.852 71.357,2.852 71.433,2.776 71.738,2.776 71.814,2.852 71.967,2.852 72.043,2.776 72.348,2.776 72.5,2.776 72.736,2.776 v1(72.86,2.9) ; J3.13@118.35,6.75 118.35,6.575 118.251,6.476 118.251,4.049 118.776,3.524 118.776,2.724 v1(118.9,2.6)
  L4-BOT w0.076: v1(72.86,2.9) 72.984,2.776 77.261,2.776 77.784,3.3 84.416,3.3 85.163,2.552 109.252,2.552 110.852,4.152 111.923,4.152 113.575,2.5 115,2.5 116.652,4.152 117.763,4.152 118.776,3.139 118.776,2.724 v1(118.9,2.6)
MIPI_DSI00_1_N: J3.17 U2.J7 | length 63.9
  L1-TOP w0.076: U2.J7@68.1,7.875 67.9,7.675 67.9,7.392 67.948,7.345 67.948,5.697 69.121,4.524 72.736,4.524 v1(72.86,4.4) ; J3.17@119.05,6.75 119.05,6.575 119.149,6.476 119.149,5.136 120.324,3.961 120.324,3.424 v1(120.2,3.3)
  L4-BOT w0.076: v1(72.86,4.4) 72.984,4.524 84.976,4.524 85.8,3.7 105.9,3.7 108.1,5.9 108.509,5.9 109.509,4.9 110.125,4.9 111.125,5.9 111.484,5.9 112.484,4.9 113.125,4.9 114.125,5.9 114.534,5.9 115.534,4.9 116.2,4.9 116.692,5.392 117.708,5.392 118.9,4.2 119.8,4.2 120.324,3.676 120.324,3.424 v1(120.2,3.3)
MIPI_DSI00_1_P: J3.19 U2.K7 | length 63.9
  L1-TOP w0.076: U2.K7@68.1,7.475 68.1,6.4 68.1,6.217 68.176,6.141 68.176,5.989 68.1,5.912 68.1,5.76 68.214,5.646 68.429,5.431 68.537,5.431 68.645,5.323 68.645,5.215 68.86,5 68.968,5 69.076,4.892 69.076,4.784 69.184,4.676 69.231,4.676 69.536,4.676 69.612,4.752 69.764,4.752 69.841,4.676 70.145,4.676 70.222,4.752 70.374,4.752 70.45,4.676 70.755,4.676 70.831,4.752 70.984,4.752 71.06,4.676 71.365,4.676 71.441,4.752 71.593,4.752 71.669,4.676 71.974,4.676 72.05,4.752 72.203,4.752 72.279,4.676 72.584,4.676 72.736,4.676 v1(72.86,4.8) ; J3.19@119.4,6.75 119.4,6.575 119.301,6.476 119.301,5.199 120.476,4.024 120.476,3.424 v1(120.6,3.3)
  L4-BOT w0.076: v1(72.86,4.8) 72.984,4.676 85.039,4.676 85.863,3.852 105.837,3.852 108.037,6.052 108.573,6.052 109.573,5.052 110.062,5.052 111.062,6.052 111.548,6.052 112.548,5.052 113.062,5.052 114.062,6.052 114.598,6.052 115.598,5.052 116.137,5.052 116.629,5.545 117.771,5.545 118.963,4.352 119.863,4.352 120.476,3.739 120.476,3.424 v1(120.6,3.3)
MIPI_DSI00_2_N: J3.24 U2.J8 | length 63.9
  L1-TOP w0.076: U2.J8@68.5,7.875 68.3,7.675 68.3,7.392 68.348,7.345 68.348,6.552 69.426,5.474 72.736,5.474 v1(72.86,5.35) ; v1(106.6,6.7) 106.724,6.824 107.153,6.824 107.381,7.051 107.381,7.223 107.519,7.361 107.7,7.361 107.838,7.223 107.838,6.514 108.066,6.286 108.373,6.286 108.6,6.514 108.6,7.223 108.738,7.361 108.919,7.361 109.057,7.223 109.057,6.514 109.285,6.286 109.592,6.286 109.819,6.514 109.819,7.223 109.958,7.361 110.138,7.361 110.277,7.223 110.277,7.051 110.504,6.824 110.839,6.824 111.952,7.937 111.952,9.052 113.9,11 119.4,11 120.199,10.201 120.199,9.024 120.1,8.925 J3.24@120.1,8.75
  L4-BOT w0.076: v1(72.86,5.35) 72.984,5.474 74.126,5.474 74.552,5.048 95.448,5.048 98.2,7.8 105.184,7.8 106.161,6.824 106.476,6.824 v1(106.6,6.7)
MIPI_DSI00_2_P: J3.26 U2.K8 | length 63.9
  L1-TOP w0.076: U2.K8@68.5,7.475 68.5,6.616 68.608,6.508 68.716,6.508 68.823,6.4 68.823,6.292 69.039,6.077 69.147,6.077 69.254,5.969 69.254,5.861 69.47,5.646 69.489,5.626 69.642,5.626 69.718,5.702 69.87,5.702 69.946,5.626 70.251,5.626 70.327,5.702 70.48,5.702 70.556,5.626 70.861,5.626 70.937,5.702 71.089,5.702 71.166,5.626 71.47,5.626 71.547,5.702 71.699,5.702 71.775,5.626 72.08,5.626 72.156,5.702 72.309,5.702 72.385,5.626 72.69,5.626 72.736,5.626 v1(72.86,5.75) ; v1(106.6,7.1) 106.724,6.976 107.09,6.976 107.229,7.114 107.229,7.286 107.456,7.514 107.763,7.514 107.991,7.286 107.991,6.577 108.129,6.439 108.31,6.439 108.448,6.577 108.448,7.286 108.675,7.514 108.982,7.514 109.21,7.286 109.21,6.577 109.348,6.439 109.529,6.439 109.667,6.577 109.667,7.286 109.895,7.514 110.201,7.514 110.429,7.286 110.429,7.114 110.567,6.976 110.776,6.976 111.8,8 111.8,9.116 113.837,11.152 119.463,11.152 120.351,10.264 120.351,9.024 120.45,8.925 J3.26@120.45,8.75
  L4-BOT w0.076: v1(72.86,5.75) 72.984,5.626 73.3,5.626 73.452,5.626 73.529,5.702 73.681,5.702 73.757,5.626 73.8,5.626 74.189,5.626 74.616,5.2 95.384,5.2 98.137,7.952 105.248,7.952 106.224,6.976 106.476,6.976 v1(106.6,7.1)
MIPI_DSI00_3_N: J3.12 U2.J4 | length 63.9
  L1-TOP w0.076: U2.J4@66.9,7.875 66.7,7.675 66.7,7.343 66.744,7.299 66.744,3.2 68.221,1.724 72.736,1.724 v1(72.86,1.6) ; v1(111.5,2) 111.5,2.192 113.9,4.592 113.9,8.5 115.1,9.7 117.737,9.7 118.099,9.338 118.099,9.024 118,8.925 J3.12@118,8.75
  L4-BOT w0.076: v1(72.86,1.6) 72.984,1.724 78.024,1.724 78.8,2.5 84,2.5 84.745,1.755 111.063,1.755 111.308,2 v1(111.5,2)
MIPI_DSI00_3_P: J3.14 U2.K4 | length 63.9
  L1-TOP w0.076: U2.K4@66.9,7.475 66.9,4.1 66.9,3.948 66.976,3.871 66.976,3.719 66.9,3.643 66.9,3.338 66.9,3.26 67.008,3.152 67.116,3.152 67.223,3.044 67.223,2.937 67.439,2.721 67.547,2.721 67.654,2.613 67.654,2.506 67.87,2.29 67.978,2.29 68.085,2.182 68.085,2.075 68.284,1.876 68.436,1.876 68.741,1.876 68.817,1.952 68.97,1.952 69.046,1.876 69.351,1.876 69.427,1.952 69.579,1.952 69.655,1.876 69.96,1.876 70.036,1.952 70.189,1.952 70.265,1.876 70.57,1.876 70.646,1.952 70.798,1.952 70.875,1.876 71,1.876 72.736,1.876 v1(72.86,2) ; v1(111.2,2.3) 111.392,2.3 113.748,4.655 113.748,8.563 115.037,9.852 117.8,9.852 118.251,9.401 118.251,9.024 118.35,8.925 J3.14@118.35,8.75
  L4-BOT w0.076: v1(72.86,2) 72.984,1.876 77.961,1.876 78.737,2.652 84.063,2.652 84.808,1.908 111,1.908 111.2,2.108 v1(111.2,2.3)
MIPI_DSI00_C_N: J3.18 U2.J6 | length 63.9
  L1-TOP w0.076: U2.J6@67.7,7.875 67.5,7.675 67.5,7.392 67.548,7.345 67.548,4.997 68.971,3.574 72.736,3.574 v1(72.86,3.45) ; v1(108.5,3.5) 108.5,3.692 108.755,3.948 110.448,3.948 110.738,4.238 110.738,4.516 110.646,4.608 110.646,4.76 110.817,4.931 110.97,4.931 111.368,4.533 111.647,4.533 111.907,4.793 111.907,5.071 111.508,5.47 111.508,5.623 111.679,5.793 111.832,5.793 112.23,5.395 112.509,5.395 112.769,5.655 112.769,5.934 112.678,6.025 112.678,6.178 112.952,6.452 112.952,8.752 114.5,10.3 118.46,10.3 119.149,9.611 119.149,9.024 119.05,8.925 J3.18@119.05,8.75
  L4-BOT w0.076: v1(72.86,3.45) 72.984,3.574 76.674,3.574 76.892,3.792 84.708,3.792 85.5,3 107.808,3 108.308,3.5 v1(108.5,3.5)
MIPI_DSI00_C_P: J3.20 U2.K6 | length 63.9
  L1-TOP w0.076: U2.K6@67.7,7.475 67.7,5.3 67.7,5.148 67.7,5.06 67.808,4.952 67.916,4.952 68.023,4.844 68.023,4.737 68.239,4.521 68.347,4.521 68.454,4.413 68.454,4.306 68.67,4.09 68.778,4.09 68.885,3.982 68.885,3.875 69.034,3.726 69.186,3.726 69.491,3.726 69.567,3.802 69.72,3.802 69.796,3.726 70.101,3.726 70.177,3.802 70.329,3.802 70.405,3.726 70.71,3.726 70.786,3.802 70.939,3.802 71.015,3.726 71.32,3.726 71.396,3.802 71.548,3.802 71.625,3.726 71.929,3.726 72.006,3.802 72.158,3.802 72.234,3.726 72.3,3.726 72.736,3.726 v1(72.86,3.85) ; v1(108.2,3.8) 108.392,3.8 108.692,4.1 110.384,4.1 110.585,4.301 110.585,4.453 110.494,4.545 110.494,4.824 110.754,5.084 111.033,5.084 111.431,4.685 111.584,4.685 111.755,4.856 111.755,5.008 111.356,5.407 111.356,5.686 111.616,5.946 111.895,5.946 112.293,5.547 112.446,5.547 112.617,5.718 112.617,5.87 112.525,5.962 112.525,6.241 112.8,6.516 112.8,8.816 114.437,10.452 118.523,10.452 119.301,9.674 119.301,9.024 119.4,8.925 J3.20@119.4,8.75
  L4-BOT w0.076: v1(72.86,3.85) 72.984,3.726 76.611,3.726 76.829,3.945 84.771,3.945 85.563,3.152 107.745,3.152 108.2,3.608 v1(108.2,3.8)
MIPI_DSI01_0_N: J3.38 U2.G9 | length 63.9
  L1-TOP w0.076: U2.G9@68.9,8.675 69.1,8.875 69.383,8.875 69.43,8.827 70.027,8.827 70.626,9.426 72.736,9.426 v1(72.86,9.55) ; J3.38@122.55,8.75 122.55,8.925 122.451,9.024 122.451,9.326 v1(122.575,9.45) v1@122.563,9.45
  L4-BOT w0.076: v1(72.86,9.55) 72.984,9.426 77.334,9.426 77.608,9.152 93.837,9.152 95.984,11.3 110.6,11.3 110.8,11.1 111.297,11.1 111.568,11.371 111.898,11.371 112.076,11.193 112.076,10.918 112.165,10.829 112.369,10.829 112.457,10.918 112.457,11.193 112.635,11.371 112.965,11.371 113.143,11.193 113.143,10.918 113.232,10.829 113.435,10.829 113.524,10.918 113.524,11.193 113.702,11.371 114.032,11.371 114.21,11.193 114.21,10.918 114.299,10.829 114.502,10.829 114.591,10.918 114.591,11.193 114.769,11.371 115.099,11.371 115.277,11.193 115.277,10.918 115.365,10.829 115.569,10.829 115.658,10.918 115.658,11.193 115.836,11.371 116.166,11.371 116.344,11.193 116.344,10.918 116.432,10.829 116.636,10.829 116.725,10.918 116.725,11.193 116.902,11.371 117.232,11.371 117.41,11.193 117.41,10.918 117.499,10.829 117.703,10.829 117.791,10.918 117.791,11.193 117.969,11.371 118.299,11.371 118.477,11.193 118.477,10.918 118.566,10.829 118.769,10.829 118.858,10.918 118.858,11.193 119.036,11.371 119.366,11.371 119.544,11.193 119.544,10.918 119.633,10.829 119.836,10.829 119.925,10.918 119.925,11.193 120.103,11.371 120.433,11.371 120.611,11.193 120.611,10.918 120.699,10.829 120.903,10.829 121.174,11.1 121.716,11.1 122.451,10.364 122.451,9.574 v1(122.575,9.45)
MIPI_DSI01_0_P: J3.36 U2.G10 | length 64
  L1-TOP w0.076: U2.G10@69.3,8.675 70.091,8.675 70.689,9.274 70.7,9.274 70.924,9.274 71,9.198 71.152,9.198 71.228,9.274 71.533,9.274 71.609,9.198 71.762,9.198 71.838,9.274 72.143,9.274 72.219,9.198 72.371,9.198 72.448,9.274 72.6,9.274 72.736,9.274 v1(72.86,9.15) ; v1@122.187,9.45 v1(122.175,9.45) 122.299,9.326 122.299,9.024 122.2,8.925 J3.36@122.2,8.75
  L4-BOT w0.076: v1(72.86,9.15) 72.984,9.274 73.1,9.274 73.252,9.274 73.557,9.274 73.633,9.198 73.786,9.198 73.862,9.274 74.167,9.274 74.243,9.198 74.395,9.198 74.472,9.274 74.776,9.274 74.853,9.198 75.005,9.198 75.081,9.274 75.386,9.274 75.462,9.198 75.615,9.198 75.691,9.274 75.996,9.274 76.072,9.198 76.224,9.198 76.3,9.274 76.605,9.274 76.681,9.198 76.834,9.198 76.91,9.274 77.215,9.274 77.271,9.274 77.544,9 77.697,9 77.773,8.924 77.925,8.924 78.002,9 78.306,9 78.383,8.924 78.535,8.924 78.611,9 78.916,9 78.992,8.924 79.145,8.924 79.221,9 93.9,9 96.048,11.148 110.537,11.148 110.737,10.948 111.361,10.948 111.632,11.219 111.835,11.219 111.924,11.13 111.924,10.855 112.102,10.677 112.432,10.677 112.61,10.855 112.61,11.13 112.698,11.219 112.902,11.219 112.991,11.13 112.991,10.855 113.169,10.677 113.499,10.677 113.677,10.855 113.677,11.13 113.765,11.219 113.969,11.219 114.058,11.13 114.058,10.855 114.235,10.677 114.565,10.677 114.743,10.855 114.743,11.13 114.832,11.219 115.036,11.219 115.124,11.13 115.124,10.855 115.302,10.677 115.632,10.677 115.81,10.855 115.81,11.13 115.899,11.219 116.102,11.219 116.191,11.13 116.191,10.855 116.369,10.677 116.699,10.677 116.877,10.855 116.877,11.13 116.966,11.219 117.169,11.219 117.258,11.13 117.258,10.855 117.436,10.677 117.766,10.677 117.944,10.855 117.944,11.13 118.032,11.219 118.236,11.219 118.325,11.13 118.325,10.855 118.503,10.677 118.833,10.677 119.011,10.855 119.011,11.13 119.099,11.219 119.303,11.219 119.392,11.13 119.392,10.855 119.569,10.677 119.899,10.677 120.077,10.855 120.077,11.13 120.166,11.219 120.37,11.219 120.458,11.13 120.458,10.855 120.636,10.677 120.966,10.677 121.237,10.948 121.652,10.948 122.299,10.301 122.299,9.574 v1(122.175,9.45)
MIPI_DSI01_1_N: J3.32 U2.J10 | length 63.9
  L1-TOP w0.076: U2.J10@69.3,7.875 69.424,7.751 69.724,7.751 69.949,7.526 72.736,7.526 v1(72.86,7.65) ; v1(109,9.4) 109.192,9.4 109.445,9.653 109.445,9.816 109.079,10.182 109.079,10.472 109.275,10.667 109.564,10.667 110.522,9.709 110.686,9.709 110.792,9.815 110.792,9.978 109.834,10.936 109.834,11.226 110.029,11.421 110.319,11.421 111.277,10.463 111.44,10.463 111.546,10.57 111.546,10.733 111.18,11.099 111.18,11.388 111.545,11.752 120.263,11.752 121.401,10.614 121.401,9.024 121.5,8.925 J3.32@121.5,8.75
  L4-BOT w0.076: v1(72.86,7.65) 72.984,7.526 75.289,7.526 76.316,6.5 93.96,6.5 97.312,9.852 107.363,9.852 108.263,8.952 108.745,8.952 109,9.208 v1(109,9.4)
MIPI_DSI01_1_P: J3.30 U2.K10 | length 63.9
  L1-TOP w0.076: U2.K10@69.3,7.475 69.424,7.599 69.661,7.599 69.886,7.374 69.9,7.374 70.114,7.374 70.19,7.298 70.343,7.298 70.419,7.374 70.724,7.374 70.8,7.298 70.952,7.298 71.028,7.374 71.333,7.374 71.409,7.298 71.562,7.298 71.638,7.374 71.943,7.374 72.019,7.298 72.171,7.298 72.248,7.374 72.4,7.374 72.736,7.374 v1(72.86,7.25) ; v1(109.3,9.1) 109.3,9.292 109.598,9.59 109.598,9.879 109.232,10.245 109.232,10.408 109.338,10.515 109.501,10.515 110.459,9.557 110.749,9.557 110.944,9.752 110.944,10.042 109.986,11 109.986,11.163 110.092,11.269 110.256,11.269 111.214,10.311 111.503,10.311 111.699,10.507 111.699,10.796 111.333,11.162 111.333,11.325 111.608,11.6 120.2,11.6 121.249,10.551 121.249,9.024 121.15,8.925 J3.30@121.15,8.75
  L4-BOT w0.076: v1(72.86,7.25) 72.984,7.374 75.226,7.374 76.252,6.348 94.023,6.348 97.376,9.7 107.3,9.7 108.2,8.8 108.808,8.8 109.108,9.1 v1(109.3,9.1)
MIPI_DSI01_2_N: J3.25 U2.J9 | length 63.9
  L1-TOP w0.076: U2.J9@68.9,7.875 69.1,7.675 69.1,7.375 69.05,7.325 69.05,7.166 69.639,6.576 72.736,6.576 v1(72.86,6.7) ; J3.25@120.45,6.75 120.45,6.575 120.351,6.476 120.351,6.174 v1(120.475,6.05) v1@120.463,6.05
  L4-BOT w0.076: v1(72.86,6.7) 72.984,6.576 74.939,6.576 75.716,5.8 94.6,5.8 97.7,8.9 106.8,8.9 108.375,7.325 108.6,7.325 108.829,7.554 108.829,7.755 109.026,7.953 109.394,7.953 109.591,7.755 109.591,7.06 109.698,6.952 109.94,6.952 110.048,7.06 110.048,7.755 110.245,7.953 110.613,7.953 110.81,7.755 110.81,7.06 110.918,6.952 111.159,6.952 111.267,7.06 111.267,7.755 111.464,7.953 111.832,7.953 112.029,7.755 112.029,7.06 112.137,6.952 112.378,6.952 112.486,7.06 112.486,7.755 112.683,7.953 113.051,7.953 113.248,7.755 113.248,7.06 113.356,6.952 113.598,6.952 114.998,8.352 119.248,8.352 120.351,7.249 120.351,6.174 v1(120.475,6.05)
MIPI_DSI01_2_P: J3.23 U2.K9 | length 63.9
  L1-TOP w0.076: U2.K9@68.9,7.475 68.898,7.473 68.898,7.102 69.005,6.995 69.221,6.779 69.221,6.671 69.329,6.564 69.436,6.564 69.576,6.424 69.729,6.424 70.033,6.424 70.11,6.348 70.262,6.348 70.338,6.424 70.643,6.424 70.719,6.348 70.872,6.348 70.948,6.424 71.253,6.424 71.329,6.348 71.481,6.348 71.557,6.424 71.862,6.424 71.938,6.348 72.091,6.348 72.167,6.424 72.3,6.424 72.736,6.424 v1(72.86,6.3) ; v1@120.087,6.05 v1(120.075,6.05) 120.199,6.174 120.199,6.476 120.1,6.575 J3.23@120.1,6.75
  L4-BOT w0.076: v1(72.86,6.3) 72.984,6.424 73.1,6.424 73.252,6.424 73.557,6.424 73.633,6.348 73.786,6.348 73.862,6.424 74.167,6.424 74.243,6.348 74.395,6.348 74.472,6.424 74.7,6.424 74.876,6.424 74.984,6.316 75.199,6.101 75.199,5.993 75.307,5.885 75.415,5.885 75.652,5.648 94.663,5.648 97.763,8.748 106.737,8.748 108.312,7.173 108.663,7.173 108.981,7.49 108.981,7.692 109.089,7.8 109.33,7.8 109.438,7.692 109.438,6.997 109.635,6.8 110.003,6.8 110.2,6.997 110.2,7.692 110.308,7.8 110.55,7.8 110.657,7.692 110.657,6.997 110.854,6.8 111.222,6.8 111.419,6.997 111.419,7.692 111.527,7.8 111.769,7.8 111.877,7.692 111.877,6.997 112.074,6.8 112.442,6.8 112.639,6.997 112.639,7.692 112.746,7.8 112.988,7.8 113.096,7.692 113.096,6.997 113.293,6.8 113.661,6.8 115.061,8.2 119.184,8.2 120.199,7.186 120.199,6.174 v1(120.075,6.05)
MIPI_DSI01_3_N: J3.37 U2.F9 | length 63.9
  L1-TOP w0.076: U2.F9@68.9,9.075 69.1,9.275 69.383,9.275 69.43,9.227 69.527,9.227 70.452,10.152 71.897,10.152 72.121,10.376 72.736,10.376 v1(72.86,10.5) ; J3.37@122.55,6.75 122.55,6.575 122.451,6.476 122.451,6.174 v1(122.575,6.05) v1@122.563,6.05
  L4-BOT w0.076: v1(72.86,10.5) 72.984,10.376 78.024,10.376 78.548,9.852 93.237,9.852 95.437,12.052 122.663,12.052 123.052,11.663 123.052,11.148 123.348,10.852 123.748,10.852 124.1,10.5 124.1,9.313 122.451,7.664 122.451,6.174 v1(122.575,6.05)